# Altium PCB BLDC_Drive.PcbDoc (part 2 of 2)
Units mm, origin at the board's own origin, x right, y up, seen from the top; angles counter-clockwise.
Board outline 173.9 x 91 mm, 4 copper layers (Top Layer, Layer 1, Layer 2, Bottom Layer), stack 0.48 mm thick; 165 components, 96 nets, 478 pads, 711 vias.
Unrouted connection lines stored in the file: 223.
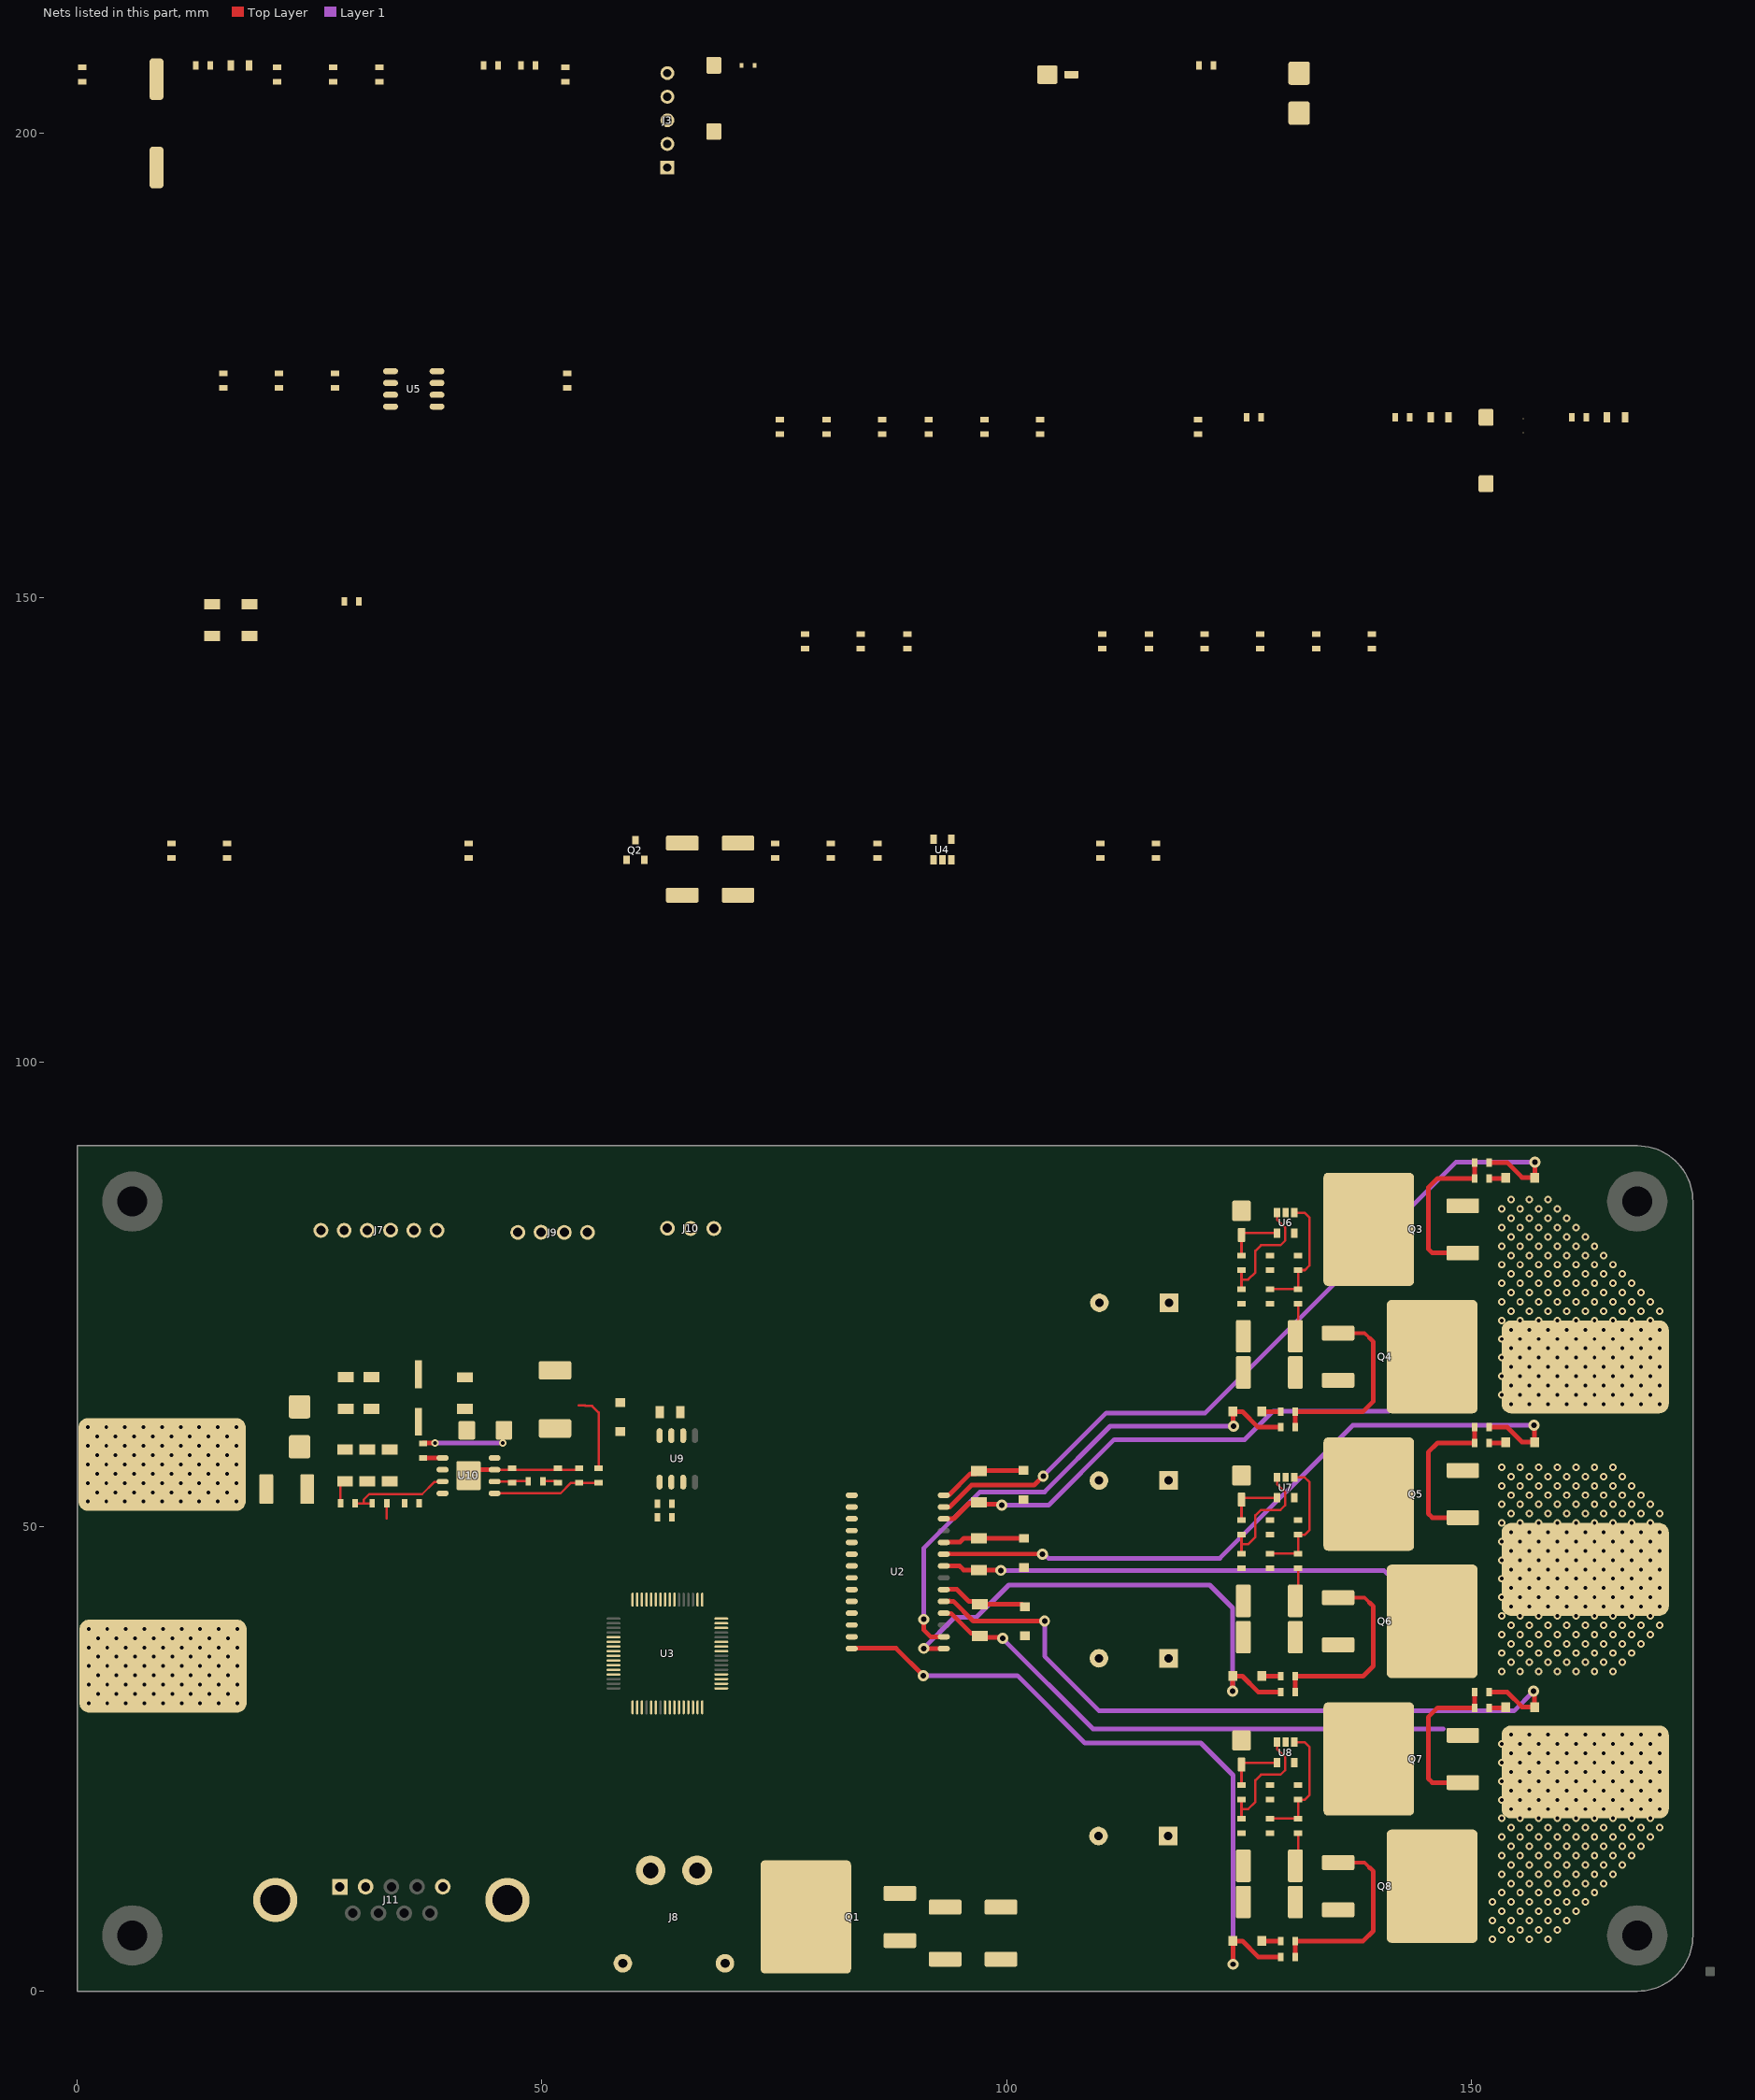
[diagram p3: the nets of this part, all layers, seen from the top]

## Part data
B1 B2: library part "Button 2 Conn", "Button 2 Conn SMD", Manufacturer="KLS electronic co ltd", Part Number=L-KLS7-TS3608-5.0-180, ComponentLink1Description=Chip&Dip, ComponentLink1URL=https://www.chipdip.ru/product/kls7-ts3608-5.0-180-td-02xa, Type=Button
C3 C4 C5 C6: library part "Cap Pol 470uF (100V)", "ECAP, 100V, 105°C, 20%, 8x16mm", Manufacturer=JB, Part Number=JRB2A471M07501600250000B, Voltage=100V, ComponentLink1Description=Chip&Dip, ComponentLink1URL=https://www.chipdip.ru/product0/9000565913, Type=Capacitor
C7 C8 C39 C42: library part "Cap 4.7uF (1206)", "4.7uF X7R 10% 50V 1206", Manufacturer="Murata Manufacturing", Part Number=GRM31CR71H475KA12L, Voltage=50V, ComponentLink1Description=Chip&Dip, ComponentLink1URL=https://www.chipdip.ru/product/grm31cr71h475ka12l, Type=Capacitor
C9 C10 C13 C40 C41: library part "Cap 0.1uF (1206)", "0.1uF X7R 100V 10% 1206", Manufacturer="Murata Manufacturing", Part Number=GRM319R72A104KA01D, Voltage=100V, ComponentLink1Description=Chip&Dip, ComponentLink1URL=https://www.chipdip.ru/product0/9000697437, Type=Capacitor
C11 C14 C15 C17 C18 C20 C21 C22 C23 C24 C25 C26 C27 C28 C29 C30 C33 C34 C35 C36 C48 C49: library part "Cap 0.1uF (0603)", "0.1uF X7R 16V 10% 0603", Manufacturer="Murata Manufacturing", Part Number=GRM188R71C104KA01D, Voltage=16V, ComponentLink1Description=Chip&Dip, ComponentLink1URL=https://www.chipdip.ru/product/grm188r71c104ka01d, Type=Capacitor
C12 C16: library part "Cap 18pF (0603)", "18pF NP0 50V 5% 0603", Manufacturer="Murata Manufacturing", Part Number=GRM1885C1H180JA01D, Voltage=50V, ComponentLink1Description=Chip&Dip, ComponentLink1URL=https://www.chipdip.ru/product/grm1885c1h180j, Type=Capacitor
C19: library part "Cap 4.7uF (0603)", "4.7uF X5R 25V 10% 0603", Manufacturer="Murata Manufacturing", Part Number=GRM188R61E475KE11D, Voltage=25V, ComponentLink1Description=Chip&Dip, ComponentLink1URL=https://www.chipdip.ru/product0/9000348448, Type=Capacitor
C31: library part "Cap 10nF (0603)", "X7R 10nF 100V 10% 0603", Manufacturer="Murata Manufacturing", Part Number=GRM188R72A103KA01D, Voltage=100V, ComponentLink1Description=Chip&Dip, ComponentLink1URL=https://www.chipdip.ru/product/grm188r72a103ka01d, Type=Capacitor
C32: library part "Cap 1uF (0603)", "1uF X5R 25V 10% 0603", Manufacturer="Murata Manufacturing", Part Number=GRM188R61E105KAADD, Voltage=25V, ComponentLink1Description=Chip&Dip, ComponentLink1URL=https://www.chipdip.ru/product/grm188r61e105k, Type=Capacitor
C37: library part "Cap Pol 47uF (25V)", "ECAP SMD,  25V, 105°C, 20%", Manufacturer=JB, Part Number=JCK1E470M063054, Voltage=25V, ComponentLink1Description=Chip&Dip, ComponentLink1URL=https://www.chipdip.ru/product0/9000565730, Type=Capacitor
C43 C44: library part "Cap 2.2uF (1206)", "2.2uF X7R 10% 100V 1206", Manufacturer="Murata Manufacturing", Part Number=GRM31CR72A225KA73L, Voltage=100V, ComponentLink1Description=Chip&Dip, ComponentLink1URL=https://www.chipdip.ru/product0/9000385299, Type=Capacitor
C45: library part "Cap 22pF (0603)", "22pF NP0 50V 5% 0603", Manufacturer=Taiwan, Part Number=MLCC22pFNPO50V5%0603, Voltage=50V, ComponentLink1Description=Chip&Dip, ComponentLink1URL=https://www.chipdip.ru/product0/472852716, Type=Capacitor
C46: library part "Cap 22nF (0603)", "22nF X7R 50V 10% 0603", Manufacturer="Murata Manufacturing", Part Number=GRM188R71H223KA01D, Voltage=50V, ComponentLink1Description=Chip&Dip, ComponentLink1URL=https://www.chipdip.ru/product/grm188r71h223k, Type=Capacitor
C47: library part "Cap 0.33uF (0805)", "0.33uF X7R 25V 10% 0805", Manufacturer="Murata Manufacturing", Part Number=GRM21BR71E334KA01L, Voltage=25V, ComponentLink1Description=Chip&Dip, ComponentLink1URL=https://www.chipdip.ru/product/grm21br71e334k, Type=Capacitor
D1 D2 D4: library part "Diode Schottky 120V (SOD-123FL)", Manufacturer="Yangzhou Yangjie Electronic Technology Co", Part Number=S120, ComponentLink1Description=DataSheet, ComponentLink1URL=https://static.chipdip.ru/lib/152/DOC001152954.pdf, ComponentLink2Description=Chip&Dip, ComponentLink2URL=https://www.chipdip.ru/product/s120, Type=Diode
D3 D21: library part "TVS Diode 48V [SMBJ]", "600W", Manufacturer=STMicroelectronics, Part Number=SMBJ48A-TR, ComponentLink1Description=DataSheet, ComponentLink1URL=https://static.chipdip.ru/lib/252/DOC011252020.pdf, ComponentLink2Description=Chip&Dip, ComponentLink2URL=https://www.chipdip.ru/product/smbj48a, Type=Diode
D5 D12 D15 D18: library part "TVS Diode 3.3V [SM2T]", "High peak pulse power: 200 W (10/1000 μs)", Manufacturer=STMicroelectronics, Part Number=SM2T3V3A, ComponentLink1Description=DataSheet, ComponentLink1URL=https://www.st.com/resource/en/datasheet/sm2t3v3a.pdf, ComponentLink2Description=Chip&Dip, ComponentLink2URL=https://www.chipdip.ru/product0/8283670575, Type=Diode
D6: library part "Diode Schottky (SOD-523)", "Schottky Barrier Diodes, 200mA to 500mA", Manufacturer=Nexperia, Part Number=1PS79SB30,115, ComponentLink1Description=DataSheet, ComponentLink1URL=https://static.chipdip.ru/lib/583/DOC001583065.pdf, ComponentLink2Description=Chip&Dip, ComponentLink2URL=https://www.chipdip.ru/product/1ps79sb30.115, Type=Diode
D7: library part "Led Green", "Led Green SMD 1608, 120°, 525nM", Manufacturer="Taiwan Oasis Technology", Part Number=TO-1608BC-PG, ComponentLink1Description=Chip&Dip, ComponentLink1URL=https://www.chipdip.ru/product/to-1608bc-pg, Type=Diode
D8: library part "Led Yellow", "SMD 1608, 247mcd, 120°, 592nM (High Bright Yellow)", Manufacturer="Taiwan Oasis Technology", Part Number=TO-1608BC-MYF, ComponentLink1Description=Chip&Dip, ComponentLink1URL=https://www.chipdip.ru/product/to-1608bc-myf, Type=Diode
D9: library part "Led Red", "SMD 1608, 112mcd, 120°, 630nM (Ultra Bright Red)", Manufacturer="Taiwan Oasis Technology", Part Number=TO-1608BC-MRE, ComponentLink1Description=Chip&Dip, ComponentLink1URL=https://www.chipdip.ru/product/to-1608bc-mre, Type=Diode
D10 D11 D13 D14 D16 D17: library part "Diode Schottky 60V (SOD-123FL)", Manufacturer=Nexperia, Part Number=PMEG6010CEH,115, ComponentLink1Description=DataSheet, ComponentLink1URL=https://static.chipdip.ru/lib/614/DOC011614194.pdf, ComponentLink2Description=Chip&Dip, ComponentLink2URL=https://www.chipdip.ru/product/pmeg6010ceh.115, Type=Diode
D19: library part "Diode Schottky (SMA)", "Diode Schottky 3A 40V", Manufacturer=Vishay, Part Number=B340A-E3/61T, ComponentLink1Description=DataSheet, ComponentLink1URL=https://static.chipdip.ru/lib/652/DOC001652710.pdf, ComponentLink2Description=Chip&Dip, ComponentLink2URL=https://www.chipdip.ru/product/b340a-e3-61t-2, Type=Diode
D20: library part "TVS Diode 20V [SMF]", "200W", Manufacturer="Yangzhou Yangjie Electronic Technology Co., Ltd.", Part Number=SMF20A, ComponentLink1Description=DataSheet, ComponentLink1URL=https://static.chipdip.ru/lib/15https://static.chipdip.ru/lib/152/DOC001152952.pdf2/DOC001152952.pdf, ComponentLink2Description=Chip&Dip, ComponentLink2URL=https://www.chipdip.ru/product/smf20a, Type=Diode
FU1: library part "Fuse Resettable 1.5A", Manufacturer=Bourns, Part Number=MF-MSMF150-2, ComponentLink1Description=Chip&Dip, ComponentLink1URL=https://www.chipdip.ru/product0/8009663123, ComponentLink2Description=DataSheet, ComponentLink2URL=https://static.chipdip.ru/lib/167/DOC011167164.pdf, Type=Fuse
J1 J2 J4 J5 J6: library part "Conn 1 [Cable]"
J3: library part "Conn 5 (PLS)", "Header, 5-Pin"
J7: library part "Conn 6 [CWF]", "Right-Angle", Manufacturer="Ningbo connfly electronic (Zhenqin)", Part Number=DS1069-6MRW6X-B, ComponentLink1Description=Chip&Dip, ComponentLink1URL=https://www.chipdip.ru/product/cwf-6r, Type=Connector
J8: library part "Connector XT30PW-Male", "Standart RC Connector", Manufacturer=Amass, Part Number=XT30PW, ComponentLink1Description=AliExpress, ComponentLink1URL=https://ru.aliexpress.com/item/4000070113352.html?spm=a2g0o.productlist.0.0.39dd34bfyYuspa&algo_pvid=4d7d83f5-6270-4220-b100-9b5f13b0846d&algo_expid=4d7d83f5-6270-4220-b100-9b5f13b0846d-3&btsid=c67bc929-e3be-4af3-9fd9-25ac13ce4818&ws_ab_test=searchweb0_0,searchweb201602_,searchweb201603_55, Type=Connector
J9: library part "Conn 4 [CWF]", "Right-Angle", Manufacturer="Ningbo connfly electronic (Zhenqin)", Part Number=DS1069-4MRW6XB, ComponentLink1Description=Chip&Dip, ComponentLink1URL=https://www.chipdip.ru/product/cwf-4r, Type=Connector
J10: library part "Conn 3 [CWF]", "Right-Angle", Manufacturer="Ningbo connfly electronic (Zhenqin)", Part Number=DS1069-3MRW6SA, ComponentLink1Description=Chip&Dip, ComponentLink1URL=https://www.chipdip.ru/product/cwf-3r, Type=Connector
J11: library part "Connector DB9", "CONN D-SUB PLUG 9POS R/A SOLDER", Manufacturer="Auk Contractors", Part Number=DR09S-H-CN, ComponentLink1Description=DataSheet, ComponentLink1URL=https://static.chipdip.ru/lib/009/DOC004009535.pdf, ComponentLink2Description=Chip&Dip, ComponentLink2URL=https://www.chipdip.ru/product/dr09s-h-cn-drb-9fa-dbr-9f, Type=Connector
L1: library part "Ferrite Bead 220 (0603)", "Chip beads for power line. GHz noise countermeasure", Manufacturer=Murata, Part Number=BLM18PG221SN1D, ComponentLink1Description=DataSheet, ComponentLink1URL=https://product.tdk.com/en/system/files?file=dam/doc/product/emc/emc/beads/catalog/beads_commercial_power_mpz1005-e_en.pdf, ComponentLink2Description=Electronshik, ComponentLink2URL=https://www.electronshik.ru/item/MUR/BLM18PG221SN1D, ComponentLink3Description=Chip&Dip, ComponentLink3URL=https://www.chipdip.ru/product0/8007351955, Type=Inductor
L2: library part "Inductor 8.2uH (4A)", "8.2 uH, 4А, 20%, 6.9х6.5х3mm", Manufacturer=Vishay, Part Number=IHLP2525CZER8R2M01, ComponentLink1Description=DataSheet, ComponentLink1URL=https://static.chipdip.ru/lib/957/DOC011957119.pdf, ComponentLink2Description=Chip&Dip, ComponentLink2URL=https://www.chipdip.ru/product0/8698549440, ComponentLink3Description=Electronshik, ComponentLink3URL=https://www.electronshik.ru/item/VISHAY/IHLP2525CZER8R2M01, Type=Inductor
Q1 Q3 Q4 Q5 Q6 Q7 Q8: library part "MOSFET-N [IRF]", "Power MOSFET utilizes the latest processing techniques to achieve extremely low on-resistance per silicon area", Manufacturer=Infineon, Part Number=IRF3710ZSTRLPBF, ComponentLink1Description=DataSheet, ComponentLink1URL=https://static.chipdip.ru/lib/300/DOC000300442.pdf, ComponentLink2Description=Chip&Dip, ComponentLink2URL=https://www.chipdip.ru/product/irf3710zspbf, Type=Transistor
Q2: library part "NPN [BC817]", "NPN general-purpose transistors", Manufacturer=Nexperia, Part Number=BC817, ComponentLink1Description=DataSheet, ComponentLink1URL=https://static.chipdip.ru/lib/156/DOC000156781.pdf, ComponentLink2Description=Chip&Dip, ComponentLink2URL=https://www.chipdip.ru/product/bc817-40, Type=Transistor
R1 R9 R16 R28 R30 R34 R39 R41 R45 R50 R52 R56: library part "Res 100k (0603)", "0.1W 0603 100k, 1%", Manufacturer=Taiwan, Part Number=RC0603FR-07100KL, ComponentLink1Description=Chip&Dip, ComponentLink1URL=https://www.chipdip.ru/product0/9000079760, Type=Resistor
R2: library part "Res 6.2k (0603)", "0.1W 0603 6.2k, 1%", Manufacturer=Taiwan, Part Number=RC0603FR-076K2L, ComponentLink1Description=Chip&Dip, ComponentLink1URL=https://www.chipdip.ru/product/0.1w-0603-6.2-kom-1, Type=Resistor
R3 R33 R44 R55 R59: library part "Res 1k (0603)", "0.1W 0603 1k, 1%", Manufacturer=Taiwan, Part Number=RC0603FR-071KL, ComponentLink1Description=Chip&Dip, ComponentLink1URL=https://www.chipdip.ru/product0/9000079676, Type=Resistor
R4 R5 R6 R29 R40 R51: library part "Res 510R (0603)", "0.1W 0603 510R, 1%", Manufacturer=Taiwan, Part Number=RC0603FR-07510RL, ComponentLink1Description=Chip&Dip, ComponentLink1URL=https://www.chipdip.ru/product0/9000079669, Type=Resistor
R7: library part "Res 3.9k (0603)", "0.1W 0603 3.9k, 1%", Manufacturer=Taiwan, Part Number=RC0603FR-073K9L, ComponentLink1Description=Chip&Dip, ComponentLink1URL=https://www.chipdip.ru/product0/9000079726, Type=Resistor
R8 R25 R27 R36 R38 R47 R49: library part "Res 100R (0603)", "0.1W 0603 100R, 1%", Manufacturer=Taiwan, Part Number=RC0603FR-07100RL, ComponentLink1Description=Chip&Dip, ComponentLink1URL=https://www.chipdip.ru/product0/9000079616, Type=Resistor
R10 R17: library part "Res 10k (0603)", "0.1W 0603 10k, 1%", Manufacturer=Taiwan, Part Number=RC0603FR-0710KL, ComponentLink1Description=Chip&Dip, ComponentLink1URL=https://www.chipdip.ru/product0/9000079736, Type=Resistor
R11: library part "Res 75k (0603)", "0.1W 0603 75k, 1%", Manufacturer=Taiwan, Part Number=RC0603FR-0775KL, ComponentLink1Description=Chip&Dip, ComponentLink1URL=https://www.chipdip.ru/product0/9000079757, Type=Resistor
R12 R13 R19 R20: library part "Res 25mR (2512)", "1W 2512 25mR, 1%", Manufacturer=Vishay, Part Number=WSL2512R0250FEA, ComponentLink1Description=Electronshik, ComponentLink1URL=https://www.electronshik.ru/item/VISHAY/WSL2512R0250FEA, Type=Resistor
R14 R15 R23: library part "Res 4.7k (0603)", "0.1W 0603 4.7k, 1%", Manufacturer=Taiwan, Part Number=RC0603FR-074K7L, ComponentLink1Description=Chip&Dip, ComponentLink1URL=https://www.chipdip.ru/product0/9000079728, Type=Resistor
R18 R21 R57 R62: library part "Res 24k (0603)", "0.1W 0603 24k, 1%", Manufacturer=Taiwan, Part Number=RC0603FR-0724KL, ComponentLink1Description=Chip&Dip, ComponentLink1URL=https://www.chipdip.ru/product/0.1w-0603-24-kom-1, Type=Resistor
R22: library part "Res 120R (0603)", "0.1W 0603 120R, 1%", Manufacturer=Taiwan, Part Number=RC0603FR-07120RL, ComponentLink1Description=Chip&Dip, ComponentLink1URL=https://www.chipdip.ru/product/0.1w-0603-120-om-1, Type=Resistor
R24 R26 R35 R37 R46 R48: library part "Res 0R (0603)", "0.1W 0603 0R, 5%", Manufacturer=Taiwan, Part Number=RC0603JR-070RL, ComponentLink1Description=Chip&Dip, ComponentLink1URL=https://www.chipdip.ru/product0/9000070541, Type=Resistor
R31 R32 R42 R43 R53 R54: library part "Res Precise 1mR (2512)", "Current Shunt, 1W 2512 1mR 1%", Manufacturer=Vishay, Part Number=WSL25121L000FEA, ComponentLink1Description=Electronshik, ComponentLink1URL=https://www.electronshik.ru/item/VISHAY/WSL25121L000FEA, Type=Resistor
R58: library part "Res 560k (0603)", "0.1W 0603 560k, 1%", Manufacturer=Taiwan, Part Number=RC0603FR-07560KL, ComponentLink1Description=Chip&Dip, ComponentLink1URL=https://www.chipdip.ru/product0/9000079778, Type=Resistor
R60: library part "Res 39k (0603)", "0.1W 0603 39k, 1%", Manufacturer=Taiwan, Part Number=RC0603FR-0739KL, ComponentLink1Description=Chip&Dip, ComponentLink1URL=https://www.chipdip.ru/product0/9000079750, Type=Resistor
R61: library part "Res 120k (0603)", "0.1W 0603 120k, 1%", Manufacturer=Taiwan, Part Number=RC0603FR-07120KL, ComponentLink1Description=Chip&Dip, ComponentLink1URL=https://www.chipdip.ru/product0/9000079762, Type=Resistor
U2: library part "MOSFET Driver 3 Channel", "High voltage, high speed power / MOSFET and IGBT driver with three independent high / and low side referenced output channels", Manufacturer=Infineon, Part Number=IR2131SPBF, ComponentLink1Description=Electronshik, ComponentLink1URL=https://www.electronshik.ru/item/INFIN/IR2131SPBF, ComponentLink2Description=DataSheet, ComponentLink2URL=https://static.chipdip.ru/lib/300/DOC000300114.pdf, ComponentLink3Description=Chip&Dip, ComponentLink3URL=https://www.chipdip.ru/product/ir2131s, Type=IC
U3: "IC MCU 32BIT 256KB FLASH 64LQFP", Manufacturer=STMicroelectronics, ComponentLink1Description=DataSheet, ComponentLink1URL=https://www.st.com/resource/en/datasheet/cd00191185.pdf, ComponentLink2Description=Chip&Dip, ComponentLink2URL=https://www.chipdip.ru/product/stm32f103rct6-2, Part Number=STM32F103RCT6, Type=IC
U4 U6 U7 U8: library part "OpAmp [LMV821]", "A single low power precision Operational Amplifier intended for use in a wide range of applications", Manufacturer="Texas Instruments", Part Number=LMV821M5, ComponentLink1Description=DataSheet, ComponentLink1URL=https://static.chipdip.ru/lib/235/DOC000235297.pdf, ComponentLink2Description=Chip&Dip, ComponentLink2URL=https://www.chipdip.ru/product/lmv821m5, Type=IC
U5: library part "RS-485 Transiever", "The ADM3485E is a 3.3 V, low power data transceiver with ±15 kV ESD protection, suitable for half-duplex communication on multipoint bus transmission lines.", Manufacturer="Analog Devices", Part Number=ADM3485EARZ-REEL, ComponentLink1Description=Chip&Dip, ComponentLink1URL=https://www.chipdip.ru/product0/8957213292, ComponentLink2Description=DataSheet, ComponentLink2URL=https://static.chipdip.ru/lib/154/DOC013154525.pdf, Type=IC
U9: library part "LDO 3.3V [L78]", "The L78L series of three-terminal positive regulators employ internal current limiting and thermal shutdown, making them essentially indestructible", Manufacturer=STMicroelectronics, Part Number=L78L33ACD13TR, ComponentLink1Description=DataSheet, ComponentLink1URL=https://static.chipdip.ru/lib/837/DOC011837500.pdf, ComponentLink2Description=Chip&Dip, ComponentLink2URL=https://www.chipdip.ru/product/l78l33acd, Type=IC
U10: library part "DC/DC Controller [TPS5450DDAR]", "The TPS5450 is  a  high-output-current PWM converter that integrates a low-resistance, high-side N-channel MOSFET", Manufacturer="Texas Instruments", Part Number=TPS5450DDAR, ComponentLink1Description=Chip&Dip, ComponentLink1URL=https://www.chipdip.ru/product/tps5450ddar-2, ComponentLink2Description=DataSheet, ComponentLink2URL=https://static.chipdip.ru/lib/787/DOC004787015.pdf, Type=IC
Y1: library part "Crystal 8MHz SMD", "Crystal. HC-49SM (US)", Manufacturer=China, Part Number=8.000MHzHC-49SM, ComponentLink1Description=Chip&Dip, ComponentLink1URL=https://www.chipdip.ru/product/8mhz-hc-49sm, Type=Crystal

## Free pads (board coordinates)
  round 6.5 hole 3.2: A(5.9,6) A(5.9,85) A(167.9,6) A(167.9,6) A(167.9,85) A(167.9,85)

## Via types
v1: diameter 0.8, hole 0.4, Top Layer to Bottom Layer, 386 vias
v2: diameter 0.8, hole 0.4, Top Layer to Bottom Layer, tented both sides, 310 vias
v3: diameter 1.2, hole 0.6, Top Layer to Bottom Layer, 15 vias

## Nets (pads, with @x,y where several pads share a name; then routed paths per layer and width w, separated by ;. In a path a pad name is that pad's centre, name@x,y a point inside that pad or via, vN(x,y) a via of type N, cw(c..) or ccw(c..) an arc to the next point about the centre after c; other vN are vias at no path point)
1-wire_temp: J10.2 R14.1 U3.58 U3.59
+3.3AV: C15.2 C31.2 C32.2 L1.2 U3.13
+3.3V: C14.2 C18.2 C19.2 C20.2 C21.1 C22.2 C23.1 C24.2 C25.2 C26.2 C27.2 C28.2 C29.2 C30.1 C33.1 C34.1 C35.1 C48.2 C49.2 D6.2 J7.1 J9.1 J10.1 L1.1 R14.2 R15.2 R21.1 R23.1 R28.2 R39.2 R50.2 U3.19 U3.32 U3.48 U3.64 U4.5 U5.8 U6.5 U7.5 U8.5 U9.1
+20V: C37.2 C39.2 C40.2 C41.2 C47.2 D1.1 D2.1 D4.1 D20.2 L2.2 R57.2 U2.1 U9.8 | length 8.5
  Top Layer w0.254: 53.932,63.05 54.65,63.05 54.7,63 55.4,63 56.1,62.3 R57.2@56.1,56.28
AGND: C15.1 C31.1 C32.1 SB1.2 U3.12
BusVoltage: D5.2 R1.1 R2.2 U3.21
CurrentSens1: D12.2 R34.2 U3.8 U6.4 | length 5.9
  Top Layer w0.254: R34.2@125.3,79.18 D12.2@125.3,81.1 ; D12.2@125.3,81.4 125.5,81.6 128.877,81.6 128.912,81.635 U6.4@128.912,81.938
CurrentSens2: D15.2 R45.2 U3.9 U7.4 | length 5.9
  Top Layer w0.254: R45.2@125.3,50.695 D15.2@125.3,52.615 ; D15.2@125.3,52.915 125.5,53.115 128.877,53.115 128.912,53.15 U7.4@128.912,53.452
CurrentSens3: D18.2 R56.2 U3.10 U8.4 | length 5.9
  Top Layer w0.254: R56.2@125.3,22.18 D18.2@125.3,24.1 ; D18.2@125.3,24.4 125.5,24.6 128.877,24.6 128.912,24.635 U8.4@128.912,24.938
Diss_Brake: R8.1 R11.2 U3.61
FAULT: U2.8 U3.26
FB: R57.1 R59.2 U10.5 | length 11.8
  Top Layer w0.254: U10.5@44.9,53.59 51.99,53.59 53.118,54.718 53.798,54.718 R59.2@53.8,54.72 ; R59.2@53.718,54.718 54.298,54.718 54.3,54.72 54.4,54.72 R57.1@56.1,54.72
FLT-CLR: U2.10 U3.27
GND: B1.1 B2.2 C3.1 C4.1 C5.1 C6.1 C7.1 C8.1 C11.1 C12.2 C14.1 C16.2 C17.2 C18.1 C19.1 C20.1 C21.2 C22.1 C23.2 C24.1 C25.1 C26.1 C27.1 C28.1 C29.1 C30.2 C33.2 C34.2 C35.2 C37.1 C39.1 C40.1 C41.1 C42.1 C43.1 C44.1 C45.1 C46.1 C47.1 C48.1 C49.1 D3.1 D5.1 D12.1 D15.1 D18.1 D19.1 D20.1 D21.1 J2.1 J3.3 J7.6 J8.A J9.4 J10.3 J11.5 J11.A Q2.2 R2.1 R3.1 R4.1 R5.1 R6.1 R7.2 R9.1 R11.1 R18.2 R19.1 R20.1 R30.1 R31.1 R32.1 R33.1 R41.1 R42.1 R43.1 R44.1 R52.1 R53.1 R54.1 R55.1 R59.1 R60.1 R61.1 SB1.1 U2.12 U2.13 U3.18 U3.31 U3.47 U3.63 U4.2 U5.5 U6.2 U7.2 U8.2 U9.2 U9.3 U9.6 U9.7 U10.7 U10.A | length 13.7
  Top Layer w0.254: R60.1@33.28,52.5 33.3,52.5 33.3,50.9 ; U10.7@44.9,56.13 46.5,56.13 51.5,56.13 52.2,56.13 R59.1@53.9,56.13
  Top Layer w0.5: U10.A@42.1,55.495 42.735,56.13 U10.7@44.9,56.13
  other v1: 1.2,31 3.2,31 5.2,31 7.2,31 9.2,31 11.2,31 13.2,31 15.2,31 17.2,31 2.2,32 4.2,32 6.2,32 8.2,32 10.2,32 12.2,32 14.2,32 16.2,32 1.2,33 3.2,33 5.2,33 7.2,33 9.2,33 11.2,33 13.2,33 15.2,33 17.2,33 2.2,34 4.2,34 6.2,34 8.2,34 10.2,34 12.2,34 14.2,34 16.2,34 1.2,35 3.2,35 5.2,35 7.2,35 9.2,35 11.2,35 13.2,35 15.2,35 17.2,35 2.2,36 4.2,36 6.2,36 8.2,36 10.2,36 12.2,36 14.2,36 16.2,36 1.2,37 3.2,37 5.2,37 7.2,37 9.2,37 11.2,37 13.2,37 15.2,37 17.2,37 2.2,38 4.2,38 6.2,38 8.2,38 10.2,38 12.2,38 14.2,38 16.2,38 1.2,39 3.2,39 5.2,39 7.2,39 9.2,39 11.2,39 13.2,39 15.2,39 17.2,39
HIN1: U2.2 U3.41
HIN2: U2.3 U3.42
HIN3: U2.4 U3.43
HO1: D10.2 R25.1 U2.27 | length 86.3
  Top Layer w0.5: U2.27@93.25,52.12 93.269,52.139 93.914,52.139 96.25,54.475 102.975,54.475 v3(103.95,55.45) ; R25.1@151.98,89.2 153.9,89.2 155.5,87.6 D10.2@156.875,87.6 ; D10.2@156.875,87.55 D10.2@156.875,87.6 ; v3(156.875,89.25) D10.2@156.875,87.6 ; D10.2@156.925,87.6 D10.2@156.875,87.6
  Layer 1 w0.5: v3(103.95,55.45) 110.751,62.251 121.401,62.251 148.4,89.25 v3(156.875,89.25)
HO2: D13.2 R36.1 U2.23 | length 76.5
  Top Layer w0.5: U2.23@93.85,47.08 93.865,47.065 103.86,47.065 v3(103.875,47.05) ; R36.1@151.98,60.715 153.9,60.715 155.5,59.115 D13.2@156.837,59.115 ; v3(156.8,60.9) 156.837,60.862 D13.2@156.837,59.115 ; D13.2@156.875,59.065 156.837,59.103 D13.2@156.837,59.115 ; D13.2@156.925,59.115 D13.2@156.837,59.115
  Layer 1 w0.5: v3(103.875,47.05) 104.064,47.05 104.514,46.6 122.962,46.6 137.262,60.9 v3(156.8,60.9)
HO3: D16.2 R47.1 U2.19 | length 78.3
  Top Layer w0.5: U2.19@93.85,42 93.869,41.981 94.275,41.981 96.406,39.85 v3(104.1,39.85) ; R47.1@151.98,32.2 153.9,32.2 155.5,30.6 D16.2@156.825,30.6 ; v3(156.757,32.3) 156.816,32.241 156.816,30.609 D16.2@156.825,30.6 ; D16.2@156.875,30.55 D16.2@156.825,30.6 ; D16.2@156.925,30.6 D16.2@156.825,30.6
  Layer 1 w0.5: v3(104.1,39.85) 104.1,36.05 109.975,30.175 154.632,30.175 v3(156.757,32.3)
LIN1: U2.5 U3.34
LIN2: U2.6 U3.35
LIN3: U2.7 U3.36
LO1: D11.2 R27.1 U2.16 | length 57.5
  Top Layer w0.5: v3(91.075,40.025) 91.075,38.9 91.825,38.15 U2.16@93.25,38.15 ; v3(124.425,60.815) 124.4,60.84 124.4,62.4 125.4,62.4 127.1,60.7 R27.1@129.52,60.7
  Layer 1 w0.5: v3(91.075,40.025) 91.075,47.675 97.15,53.75 104.1,53.75 111.165,60.815 v3(124.425,60.815)
LO2: D14.2 R38.1 U2.15 | length 55.7
  Top Layer w0.5: v3(91.075,36.9) 91.085,36.89 93.24,36.89 U2.15@93.25,36.88 ; v3(124.35,32.3) 124.362,32.312 124.362,33.903 D14.2@124.375,33.915 ; D14.2@124.4,33.915 125.4,33.915 127.1,32.215 R38.1@129.52,32.215
  Layer 1 w0.5: v3(91.075,36.9) 94.417,40.242 96.768,40.242 100.251,43.725 121.875,43.725 124.35,41.25 v3(124.35,32.3)
LO3: D17.2 R49.1 U2.14 | length 74.8
  Top Layer w0.5: U2.14@83.944,36.92 88.105,36.92 v3(91.05,33.975) ; D17.2@124.375,5.4 124.387,5.388 124.387,2.913 v3(124.4,2.9) ; D17.2@124.4,5.4 125.4,5.4 127.1,3.7 R49.1@129.52,3.7
  Layer 1 w0.5: v3(91.05,33.975) 101.175,33.975 108.425,26.725 120.925,26.725 124.4,23.25 v3(124.4,2.9)
NetC12_1: C12.1 U3.5 Y1.2
NetC16_1: C16.1 U3.6 Y1.1
NetC36_1: C36.1 U10.1 | length 2.1
  Top Layer w0.5: C36.1@37.2,57.42 37.21,57.41 39.29,57.41 U10.1@39.3,57.4
NetC36_2: C36.2 D19.2 L2.1 U10.8 | length 8.6
  Top Layer w0.5: C36.2@37.2,58.98 37.21,58.99 38.49,58.99 v1(38.5,59)
  Layer 1 w0.5: v1(38.5,59) v2(45.8,59)
NetC45_2: C45.2 R62.2 U10.6 | length 3.5
  Top Layer w0.254: U10.6@44.9,54.86 46.36,54.86 46.5,54.72 46.57,54.79 46.673,54.893 46.965,54.893 46.972,54.9 48.22,54.9
NetC46_2: C46.2 R62.1 | length 1.5
  Top Layer w0.254: R62.1@50.242,54.9 51.228,54.9 51.235,54.893 51.527,54.893 C46.2@51.7,54.72
NetD6_1: D6.1 J3.1
NetD7_1: D7.1 U3.11
NetD7_2: D7.2 R4.2
NetD8_1: D8.1 U3.24
NetD8_2: D8.2 R5.2
NetD9_1: D9.1 U3.25
NetD9_2: D9.2 R6.2
NetD10_1: D10.1 R24.1 | length 1.9
  Top Layer w0.5: R24.1@151.98,87.5 153.7,87.5 D10.1@153.8,87.6
NetD11_1: D11.1 R26.1 | length 2
  Top Layer w0.5: D11.1@127.5,62.4 R26.1@129.52,62.4
NetD13_1: D13.1 R35.1 | length 1.9
  Top Layer w0.5: R35.1@151.98,59.015 153.7,59.015 D13.1@153.8,59.115
NetD14_1: D14.1 R37.1 | length 2
  Top Layer w0.5: D14.1@127.5,33.915 R37.1@129.52,33.915
NetD16_1: D16.1 R46.1 | length 1.9
  Top Layer w0.5: R46.1@151.98,30.5 153.7,30.5 D16.1@153.8,30.6
NetD17_1: D17.1 R48.1 | length 2
  Top Layer w0.5: D17.1@127.5,5.4 R48.1@129.52,5.4
NetJ8_2: J8.2 Q1.2
NetJ9_2: J9.2 R10.2
NetJ9_3: J9.3 R17.2
NetJ11_1: J11.1 R21.2 R22.2 U5.6
NetJ11_2: J11.2 R18.1 R22.1 U5.7
NetQ1_1: Q1.1 Q2.3 R8.2
NetQ1_3: Q1.3 Q2.1 R12.2 R13.2
NetQ3_1: Q3.1 R24.2 R25.2 | length 17.6
  Top Layer w0.5: Q3.1@149.125,79.46 145.84,79.46 145.4,79.9 145.4,86.5 146.4,87.5 R24.2@150.42,87.5 R25.2@150.42,89.2
NetQ4_1: Q4.1 R26.2 R27.2 | length 21.2
  Top Layer w0.381: Q4.1@135.7,70.84 138.56,70.84 139.1,70.3
  Top Layer w0.5: R27.2@131.08,60.7 R26.2@131.08,62.45 ; R26.2@131.08,62.4 138.4,62.4 139.5,63.5 139.5,69.9 139.1,70.3
NetQ4_3: Q4.3 R29.1 R31.2 R32.2 | length 3.6
  Top Layer w0.254: R31.2@131.1,70.5 131.4,70.8 R29.1@131.4,74.005
NetQ5_1: Q5.1 R35.2 R36.2 | length 17.6
  Top Layer w0.5: Q5.1@149.125,50.975 145.84,50.975 145.4,51.415 145.4,58.015 146.4,59.015 R35.2@150.42,59.015 R36.2@150.42,60.715
NetQ6_1: Q6.1 R37.2 R38.2 | length 21.2
  Top Layer w0.381: Q6.1@135.7,42.355 138.56,42.355 139.1,41.815
  Top Layer w0.5: R38.2@131.08,32.215 R37.2@131.08,33.965 ; R37.2@131.08,33.915 138.4,33.915 139.5,35.015 139.5,41.415 139.1,41.815
NetQ6_3: Q6.3 R40.1 R42.2 R43.2 | length 3.6
  Top Layer w0.254: R42.2@131.1,42.015 131.4,42.315 R40.1@131.4,45.52
NetQ7_1: Q7.1 R46.2 R47.2 | length 17.6
  Top Layer w0.5: Q7.1@149.125,22.46 145.84,22.46 145.4,22.9 145.4,29.5 146.4,30.5 R46.2@150.42,30.5 R47.2@150.42,32.2
NetQ8_1: Q8.1 R48.2 R49.2 | length 21.2
  Top Layer w0.381: Q8.1@135.7,13.84 138.56,13.84 139.1,13.3
  Top Layer w0.5: R49.2@131.08,3.7 R48.2@131.08,5.45 ; R48.2@131.08,5.4 138.4,5.4 139.5,6.5 139.5,12.9 139.1,13.3
NetQ8_3: Q8.3 R51.1 R53.2 R54.2 | length 3.6
  Top Layer w0.254: R53.2@131.1,13.5 131.4,13.8 R51.1@131.4,17.005
NetR3_2: R3.2 U2.9
NetR7_1: R7.1 U3.60
NetR9_2: R9.2 R10.1 U4.1
NetR12_1: R12.1 R13.1 R19.2 R20.2
NetR16_1: R16.1 R17.1 U4.3
NetR28_1: R28.1 R29.2 R30.2 U6.1 | length 13.4
  Top Layer w0.254: R30.2@128.4,75.605 R29.2@131.4,75.605 ; U6.1@131,83.8 132.1,83.8 132.6,83.3 132.6,78.1 132.12,77.62 R28.1@131.4,77.62 131.4,75.715 131.49,75.625 R29.2@131.5,75.625
NetR33_2: R33.2 R34.1 U6.3 | length 13.2
  Top Layer w0.254: R33.2@125.3,75.565 125.3,76.6 ; R34.1@125.3,77.62 125.3,76.6 ; U6.3@129.1,83.8 129.132,83.768 129.132,83.068 130,82.2 130,80.8 129.5,80.3 127.4,80.3 126.8,79.7 126.8,77.385 126.015,76.6 125.3,76.6
NetR39_1: R39.1 R40.2 R41.2 U7.1 | length 13.4
  Top Layer w0.254: R41.2@128.4,47.12 R40.2@131.4,47.12 ; U7.1@131,55.315 132.1,55.315 132.6,54.815 132.6,49.615 132.12,49.135 R39.1@131.4,49.135 131.4,47.23 131.49,47.14 R40.2@131.5,47.14
NetR44_2: R44.2 R45.1 U7.3 | length 13.2
  Top Layer w0.254: R44.2@125.3,47.08 125.3,48.115 ; R45.1@125.3,49.135 125.3,48.115 ; U7.3@129.1,55.315 129.132,55.283 129.132,54.583 130,53.715 130,52.315 129.5,51.815 127.4,51.815 126.8,51.215 126.8,48.9 126.015,48.115 125.3,48.115
NetR50_1: R50.1 R51.2 R52.2 U8.1 | length 13.4
  Top Layer w0.254: R52.2@128.4,18.605 R51.2@131.4,18.605 ; U8.1@131,26.8 132.1,26.8 132.6,26.3 132.6,21.1 132.12,20.62 R50.1@131.4,20.62 131.4,18.715 131.49,18.625 R51.2@131.5,18.625
NetR55_2: R55.2 R56.1 U8.3 | length 13.2
  Top Layer w0.254: R55.2@125.3,18.565 125.3,19.6 ; R56.1@125.3,20.62 125.3,19.6 ; U8.3@129.1,26.8 129.132,26.768 129.132,26.068 130,25.2 130,23.8 129.5,23.3 127.4,23.3 126.8,22.7 126.8,20.385 126.015,19.6 125.3,19.6
NetR58_1: R58.1 R60.2 U10.3 | length 11.6
  Top Layer w0.254: R58.1@29.88,52.5 30.8,52.5 ; R60.2@31.72,52.5 30.8,52.5 ; U10.3@39.3,54.86 39.234,54.794 38.394,54.794 37.1,53.5 31.4,53.5 30.8,52.9 30.8,52.5
NetR61_2: R61.2 U10.4
NRST: B2.1 C17.1 J3.5 U3.7
SD: U2.11 U3.28
SPI1_CS: J7.2 U3.50
SPI1_MISO: J7.4 U3.56
SPI1_MOSI: J7.5 U3.57
SPI1_SCK: J7.3 U3.55
Start/Stop: B1.2 C11.2 U3.22
SWCLK: J3.2 U3.49
SWDIO: J3.4 U3.46
TensSens: R16.2 U3.17 U4.4
USART_RX: R15.1 U3.30 U5.1
USART_RX_EN: U3.33 U5.2
USART_TX: R23.2 U3.29 U5.4
USART_TX_EN: U3.62 U5.3
VB1: C9.2 D1.2 U2.28 | length 9.7
  Top Layer w0.5: U2.28@93.25,53.39 93.269,53.409 93.809,53.409 96.1,55.7 96.75,55.7 C9.2@97.05,56 97.075,56.025 101.825,56.025 D1.2@101.85,56.05
VB2: C10.2 D2.2 U2.24 | length 8.2
  Top Layer w0.5: U2.24@93.85,48.35 95,48.35 95.4,48.75 C10.2@97.05,48.75 D2.2@101.875,48.75
VB3: C13.2 D4.2 U2.20 | length 8.9
  Top Layer w0.5: U2.20@93.85,43.27 94.655,43.27 95.982,41.943 96.857,41.943 C13.2@97.15,41.65 101.65,41.65 101.925,41.375 D4.2@101.975,41.375
VBUS: C3.2 C4.2 C5.2 C6.2 C7.2 C8.2 D3.2 FU1.1 J1.1 J8.1 Q3.2 Q5.2 Q7.2 R1.2
  other v1: 1.1,52.7 3.1,52.7 5.1,52.7 7.1,52.7 9.1,52.7 11.1,52.7 13.1,52.7 15.1,52.7 17.1,52.7 2.1,53.7 4.1,53.7 6.1,53.7 8.1,53.7 10.1,53.7 12.1,53.7 14.1,53.7 16.1,53.7 1.1,54.7 3.1,54.7 5.1,54.7 7.1,54.7 9.1,54.7 11.1,54.7 13.1,54.7 15.1,54.7 17.1,54.7 2.1,55.7 4.1,55.7 6.1,55.7 8.1,55.7 10.1,55.7 12.1,55.7 14.1,55.7 16.1,55.7 1.1,56.7 3.1,56.7 5.1,56.7 7.1,56.7 9.1,56.7 11.1,56.7 13.1,56.7 15.1,56.7 17.1,56.7 2.1,57.7 4.1,57.7 6.1,57.7 8.1,57.7 10.1,57.7 12.1,57.7 14.1,57.7 16.1,57.7 1.1,58.7 3.1,58.7 5.1,58.7 7.1,58.7 9.1,58.7 11.1,58.7 13.1,58.7 15.1,58.7 17.1,58.7 2.1,59.7 4.1,59.7 6.1,59.7 8.1,59.7 10.1,59.7 12.1,59.7 14.1,59.7 16.1,59.7 1.1,60.7 3.1,60.7 5.1,60.7 7.1,60.7 9.1,60.7 11.1,60.7 13.1,60.7 15.1,60.7 17.1,60.7
Vdcdc: C42.2 C43.2 C44.2 D21.2 FU1.2 R58.2 U10.2 | length 2.9
  Top Layer w0.254: R58.2@28.32,52.5 28.32,54.9 C42.2@28.8,54.9
VS1: C9.1 J4.1 Q3.3 Q4.2 U2.26 | length 52.9
  Top Layer w0.5: U2.26@93.25,50.85 93.269,50.869 94.319,50.869 95.975,52.525 96.975,52.525 C9.1@97.05,52.6 97.216,52.434 99.366,52.434 v3(99.5,52.3)
  Layer 1 w0.5: v3(99.5,52.3) 104.525,52.3 111.6,59.375 123.814,59.375 123.824,59.365 125.026,59.365 125.036,59.375 125.65,59.375 128.7,62.425 141.125,62.425
  other v1: 154.3,63.2 156.3,63.2 158.3,63.2 160.3,63.2 162.3,63.2 164.3,63.2 166.3,63.2 168.3,63.2 170.3,63.2 155.3,64.2 157.3,64.2 159.3,64.2 161.3,64.2 163.3,64.2 165.3,64.2 167.3,64.2 169.3,64.2 154.3,65.2 156.3,65.2 158.3,65.2 160.3,65.2 162.3,65.2 164.3,65.2 166.3,65.2 168.3,65.2 170.3,65.2 155.3,66.2 157.3,66.2 159.3,66.2 161.3,66.2 163.3,66.2 165.3,66.2 167.3,66.2 169.3,66.2 154.3,67.2 156.3,67.2 158.3,67.2 160.3,67.2 162.3,67.2 164.3,67.2 166.3,67.2 168.3,67.2 170.3,67.2 155.3,68.2 157.3,68.2 159.3,68.2 161.3,68.2 163.3,68.2 165.3,68.2 167.3,68.2 169.3,68.2 154.3,69.2 156.3,69.2 158.3,69.2 160.3,69.2 162.3,69.2 164.3,69.2 166.3,69.2 168.3,69.2 170.3,69.2 155.3,70.2 157.3,70.2 159.3,70.2 161.3,70.2 163.3,70.2 165.3,70.2 167.3,70.2 169.3,70.2 154.3,71.2 156.3,71.2 158.3,71.2 160.3,71.2 162.3,71.2 164.3,71.2 166.3,71.2 168.3,71.2 170.3,71.2
  other v2: 153.3,64.2 153.3,66.2 153.3,68.2 153.3,70.2 153.3,72.2 155.3,72.2 157.3,72.2 159.3,72.2 161.3,72.2 163.3,72.2 165.3,72.2 167.3,72.2 169.3,72.2 154.3,73.2 156.3,73.2 158.3,73.2 160.3,73.2 162.3,73.2 164.3,73.2 166.3,73.2 168.3,73.2 170.3,73.2 153.3,74.2 155.3,74.2 157.3,74.2 159.3,74.2 161.3,74.2 163.3,74.2 165.3,74.2 167.3,74.2 169.3,74.2 154.3,75.2 156.3,75.2 158.3,75.2 160.3,75.2 162.3,75.2 164.3,75.2 166.3,75.2 168.3,75.2 153.3,76.2 155.3,76.2 157.3,76.2 159.3,76.2 161.3,76.2 163.3,76.2 165.3,76.2 167.3,76.2 154.3,77.2 156.3,77.2 158.3,77.2 160.3,77.2 162.3,77.2 164.3,77.2 166.3,77.2 153.3,78.2 155.3,78.2 157.3,78.2 159.3,78.2 161.3,78.2 163.3,78.2 165.3,78.2 154.3,79.2 156.3,79.2 158.3,79.2 160.3,79.2 162.3,79.2 164.3,79.2 153.3,80.2 155.3,80.2 157.3,80.2 159.3,80.2 161.3,80.2 163.3,80.2 154.3,81.2 156.3,81.2 158.3,81.2 160.3,81.2 162.3,81.2 153.3,82.2 155.3,82.2 157.3,82.2 159.3,82.2 161.3,82.2 154.3,83.2 156.3,83.2 158.3,83.2 160.3,83.2 153.3,84.2 155.3,84.2 157.3,84.2 159.3,84.2 154.3,85.2 156.3,85.2 158.3,85.2
VS2: C10.1 J5.1 Q5.3 Q6.2 U2.22 | length 48
  Top Layer w0.5: U2.22@93.25,45.77 94.97,45.77 95.39,45.35 96.75,45.35 C10.1@97.05,45.35 97.075,45.325 99.35,45.325 v3(99.375,45.3)
  Layer 1 w0.5: v3(99.375,45.3) 140.625,45.3 140.95,44.975
  other v1: 154.3,41.4 156.3,41.4 158.3,41.4 160.3,41.4 162.3,41.4 164.3,41.4 166.3,41.4 168.3,41.4 170.3,41.4 155.3,42.4 157.3,42.4 159.3,42.4 161.3,42.4 163.3,42.4 165.3,42.4 167.3,42.4 169.3,42.4 154.3,43.4 156.3,43.4 158.3,43.4 160.3,43.4 162.3,43.4 164.3,43.4 166.3,43.4 168.3,43.4 170.3,43.4 155.3,44.4 157.3,44.4 159.3,44.4 161.3,44.4 163.3,44.4 165.3,44.4 167.3,44.4 169.3,44.4 154.3,45.4 156.3,45.4 158.3,45.4 160.3,45.4 162.3,45.4 164.3,45.4 166.3,45.4 168.3,45.4 170.3,45.4 155.3,46.4 157.3,46.4 159.3,46.4 161.3,46.4 163.3,46.4 165.3,46.4 167.3,46.4 169.3,46.4 154.3,47.4 156.3,47.4 158.3,47.4 160.3,47.4 162.3,47.4 164.3,47.4 166.3,47.4 168.3,47.4 170.3,47.4 155.3,48.4 157.3,48.4 159.3,48.4 161.3,48.4 163.3,48.4 165.3,48.4 167.3,48.4 169.3,48.4 154.3,49.4 156.3,49.4 158.3,49.4 160.3,49.4 162.3,49.4 164.3,49.4 166.3,49.4 168.3,49.4 170.3,49.4
  other v2: 153.3,34.4 155.3,34.4 157.3,34.4 159.3,34.4 161.3,34.4 163.3,34.4 165.3,34.4 154.3,35.4 156.3,35.4 158.3,35.4 160.3,35.4 162.3,35.4 164.3,35.4 166.3,35.4 153.3,36.4 155.3,36.4 157.3,36.4 159.3,36.4 161.3,36.4 163.3,36.4 165.3,36.4 167.3,36.4 154.3,37.4 156.3,37.4 158.3,37.4 160.3,37.4 162.3,37.4 164.3,37.4 166.3,37.4 168.3,37.4 153.3,38.4 155.3,38.4 157.3,38.4 159.3,38.4 161.3,38.4 163.3,38.4 165.3,38.4 167.3,38.4 169.3,38.4 154.3,39.4 156.3,39.4 158.3,39.4 160.3,39.4 162.3,39.4 164.3,39.4 166.3,39.4 168.3,39.4 170.3,39.4 153.3,40.4 155.3,40.4 157.3,40.4 159.3,40.4 161.3,40.4 163.3,40.4 165.3,40.4 167.3,40.4 169.3,40.4 153.3,42.4 153.3,44.4 153.3,46.4 153.3,48.4 153.3,50.4 155.3,50.4 157.3,50.4 159.3,50.4 161.3,50.4 163.3,50.4 165.3,50.4 167.3,50.4 169.3,50.4 154.3,51.4 156.3,51.4 158.3,51.4 160.3,51.4 162.3,51.4 164.3,51.4 166.3,51.4 168.3,51.4 170.3,51.4 153.3,52.4 155.3,52.4 157.3,52.4 159.3,52.4 161.3,52.4 163.3,52.4 165.3,52.4 167.3,52.4 169.3,52.4 154.3,53.4 156.3,53.4 158.3,53.4 160.3,53.4 162.3,53.4 164.3,53.4 166.3,53.4 168.3,53.4 153.3,54.4 155.3,54.4 157.3,54.4 159.3,54.4 161.3,54.4 163.3,54.4 165.3,54.4 167.3,54.4 154.3,55.4 156.3,55.4 158.3,55.4 160.3,55.4 162.3,55.4 164.3,55.4 166.3,55.4 153.3,56.4 155.3,56.4 157.3,56.4 159.3,56.4 161.3,56.4 163.3,56.4 165.3,56.4
VS3: C13.1 J6.1 Q7.3 Q8.2 U2.18 | length 59
  Top Layer w0.5: U2.18@93.25,40.69 93.269,40.671 94.029,40.671 96.15,38.55 97.018,38.55 97.534,38.034 97.601,38.101 99.449,38.101 v3(99.583,37.967)
  Layer 1 w0.5: v3(99.583,37.967) 109.325,28.225 147.05,28.225
  other v1: 154.3,19.6 156.3,19.6 158.3,19.6 160.3,19.6 162.3,19.6 164.3,19.6 166.3,19.6 168.3,19.6 170.3,19.6 155.3,20.6 157.3,20.6 159.3,20.6 161.3,20.6 163.3,20.6 165.3,20.6 167.3,20.6 169.3,20.6 154.3,21.6 156.3,21.6 158.3,21.6 160.3,21.6 162.3,21.6 164.3,21.6 166.3,21.6 168.3,21.6 170.3,21.6 155.3,22.6 157.3,22.6 159.3,22.6 161.3,22.6 163.3,22.6 165.3,22.6 167.3,22.6 169.3,22.6 154.3,23.6 156.3,23.6 158.3,23.6 160.3,23.6 162.3,23.6 164.3,23.6 166.3,23.6 168.3,23.6 170.3,23.6 155.3,24.6 157.3,24.6 159.3,24.6 161.3,24.6 163.3,24.6 165.3,24.6 167.3,24.6 169.3,24.6 154.3,25.6 156.3,25.6 158.3,25.6 160.3,25.6 162.3,25.6 164.3,25.6 166.3,25.6 168.3,25.6 170.3,25.6 155.3,26.6 157.3,26.6 159.3,26.6 161.3,26.6 163.3,26.6 165.3,26.6 167.3,26.6 169.3,26.6 154.3,27.6 156.3,27.6 158.3,27.6 160.3,27.6 162.3,27.6 164.3,27.6 166.3,27.6 168.3,27.6 170.3,27.6
  other v2: 152.3,5.6 154.3,5.6 156.3,5.6 158.3,5.6 153.3,6.6 155.3,6.6 157.3,6.6 159.3,6.6 152.3,7.6 154.3,7.6 156.3,7.6 158.3,7.6 160.3,7.6 153.3,8.6 155.3,8.6 157.3,8.6 159.3,8.6 161.3,8.6 152.3,9.6 154.3,9.6 156.3,9.6 158.3,9.6 160.3,9.6 162.3,9.6 153.3,10.6 155.3,10.6 157.3,10.6 159.3,10.6 161.3,10.6 163.3,10.6 154.3,11.6 156.3,11.6 158.3,11.6 160.3,11.6 162.3,11.6 164.3,11.6 153.3,12.6 155.3,12.6 157.3,12.6 159.3,12.6 161.3,12.6 163.3,12.6 165.3,12.6 154.3,13.6 156.3,13.6 158.3,13.6 160.3,13.6 162.3,13.6 164.3,13.6 166.3,13.6 153.3,14.6 155.3,14.6 157.3,14.6 159.3,14.6 161.3,14.6 163.3,14.6 165.3,14.6 167.3,14.6 154.3,15.6 156.3,15.6 158.3,15.6 160.3,15.6 162.3,15.6 164.3,15.6 166.3,15.6 168.3,15.6 153.3,16.6 155.3,16.6 157.3,16.6 159.3,16.6 161.3,16.6 163.3,16.6 165.3,16.6 167.3,16.6 169.3,16.6 154.3,17.6 156.3,17.6 158.3,17.6 160.3,17.6 162.3,17.6 164.3,17.6 166.3,17.6 168.3,17.6 170.3,17.6 153.3,18.6 155.3,18.6 157.3,18.6 159.3,18.6 161.3,18.6 163.3,18.6 165.3,18.6 167.3,18.6 169.3,18.6 153.3,20.6 153.3,22.6 153.3,24.6 153.3,26.6
pads on no net: J11.3 J11.4 J11.6 J11.7 J11.8 J11.9 TP?.1 U2.17 U2.21 U2.25 U3.1 U3.2 U3.3 U3.4 U3.14 U3.15 U3.16 U3.20 U3.23 U3.37 U3.38 U3.39 U3.40 U3.44 U3.45 U3.51 U3.52 U3.53 U3.54 U9.4 U9.5

## Other copper
Top Layer:
  rectangle net VBUS: 16.775,51.7 21.875,69.875
  rectangle net VBUS: 0,60.2 18.175,76.7
  rectangle net VBUS: 114,13.6 122.2,88.1
  rectangle net VBUS: 121.9,28.7 136.7,31.1
  rectangle net VBUS: 121.9,57.215 136.7,59.615
  rectangle net VBUS: 121.9,85.7 136.7,88.1
  region net NetC36_2: 44.2,57.1 55.2,57.1 55.2,61.9 44.2,61.9 44.2,58.6
  region net +20V: 55.1,67.9 28,67.9 28,64.8 44.225,64.8 44.225,62.7 55.1,62.7
  region net Vdcdc: 22.7,60.3 27,60.3 27,56.424 40.2,56.424 40.2,55.5 38.1,55.5 36.8,54.2 27,54.2 27,51.7 22.7,51.7
  region net GND: 27.983,61.3 22.8,61.3 22.8,64 43.6,64 43.6,62.4 43.6,59 43.6,50.425 33,50.425 33,51.55 40.6,51.55 40.6,58.1 39.4,58.1 39.4,59.7 35.9,59.7 35.9,57.1 28,57.1
  region net VBUS: 21.75,64.6 26.95,69.8 21.75,69.8
  region net NetQ6_3: 137.9,35.515 128.8,35.515 128.8,43.815 133,43.815 133,40.515 137.9,40.515
  region net VBUS: 17.775,69.4 80.9,69.4 91.5,80 116.3,80 116.3,87.4 115.7,88 85.8,88 74.5,76.7 17.775,76.7
  region net VS3: 140.9,4.6 140.9,17.4 151.9,17.4 151.9,24.3 146.9,24.3 146.9,28.6 171.3,28.6 171.3,17.5 158.4,4.6
  region net VS1: 140.9,62.2 140.9,74.4 151.9,74.4 151.9,81.3 146.9,81.3 146.9,86 158.7,86 171.3,73.4 171.3,62.2
  region net VS2: 140.9,33.5 140.9,45.915 151.9,45.915 151.9,52.815 146.9,52.815 146.9,57.3 165.4,57.3 171.3,51.4 171.3,39.4 165.4,33.5
  region net VS3: 140.9,4.6 140.9,17.4 151.9,17.4 151.9,24.3 146.9,24.3 146.9,28.6 171.3,28.6 171.3,17.5 158.4,4.6
  region net VS1: 140.9,62.2 140.9,74.4 151.9,74.4 151.9,81.3 146.9,81.3 146.9,86 158.7,86 171.3,73.4 171.3,62.2
  region net VS2: 140.9,33.5 140.9,45.915 151.9,45.915 151.9,52.815 146.9,52.815 146.9,57.3 165.4,57.3 171.3,51.4 171.3,39.4 165.4,33.5
  region net NetQ8_3: 137.9,7 128.8,7 128.8,15.3 133,15.3 133,12 137.9,12
  region net NetQ4_3: 137.9,64 128.8,64 128.8,72.3 133,72.3 133,69 137.9,69
Layer 1:
  region net VS2: 140.9,33.5 140.9,45.915 151.9,45.915 151.9,52.815 146.9,52.815 146.9,57.3 165.4,57.3 171.3,51.4 171.3,39.4 165.4,33.5
  region net VS3: 140.9,4.6 140.9,17.4 151.9,17.4 151.9,24.3 146.9,24.3 146.9,28.6 171.3,28.6 171.3,17.5 158.4,4.6
  region net VS1: 140.9,62.2 140.9,74.4 151.9,74.4 151.9,81.3 146.9,81.3 146.9,86 158.7,86 171.3,73.4 171.3,62.2
Bottom Layer:
  region net VS1: 140.9,62.2 140.9,74.4 151.9,74.4 151.9,81.3 146.9,81.3 146.9,86 158.7,86 171.3,73.4 171.3,62.2
  region net VS2: 140.9,33.5 140.9,45.915 151.9,45.915 151.9,52.815 146.9,52.815 146.9,57.3 165.4,57.3 171.3,51.4 171.3,39.4 165.4,33.5
  region net VS3: 140.9,4.6 140.9,17.4 151.9,17.4 151.9,24.3 146.9,24.3 146.9,28.6 171.3,28.6 171.3,17.5 158.4,4.6

## Silkscreen, mask and mechanical layers (free items; w line width, h text height)
Top Overlay:
  text "Phase1" at 159,72.9 h2
  text "VCC+" at 5.7,62.1 h2
  text "Phase2" at 158.8,50.8 h2
  text "VCC-" at 6,40.7 h2
  text "Phase3" at 158.9,29 h2
Mechanical 1:
  the board outline again, w0.1